# Altium PCB VoxPopuli.PcbDoc
Units mm, origin at the board's own origin, x right, y up, seen from the top; angles counter-clockwise.
Board outline 152.4 x 101.6 mm, 2 copper layers (Top Layer, Bottom Layer); 16 components, 29 nets, 96 pads, 0 vias.
Unrouted connection lines stored in the file: 51.
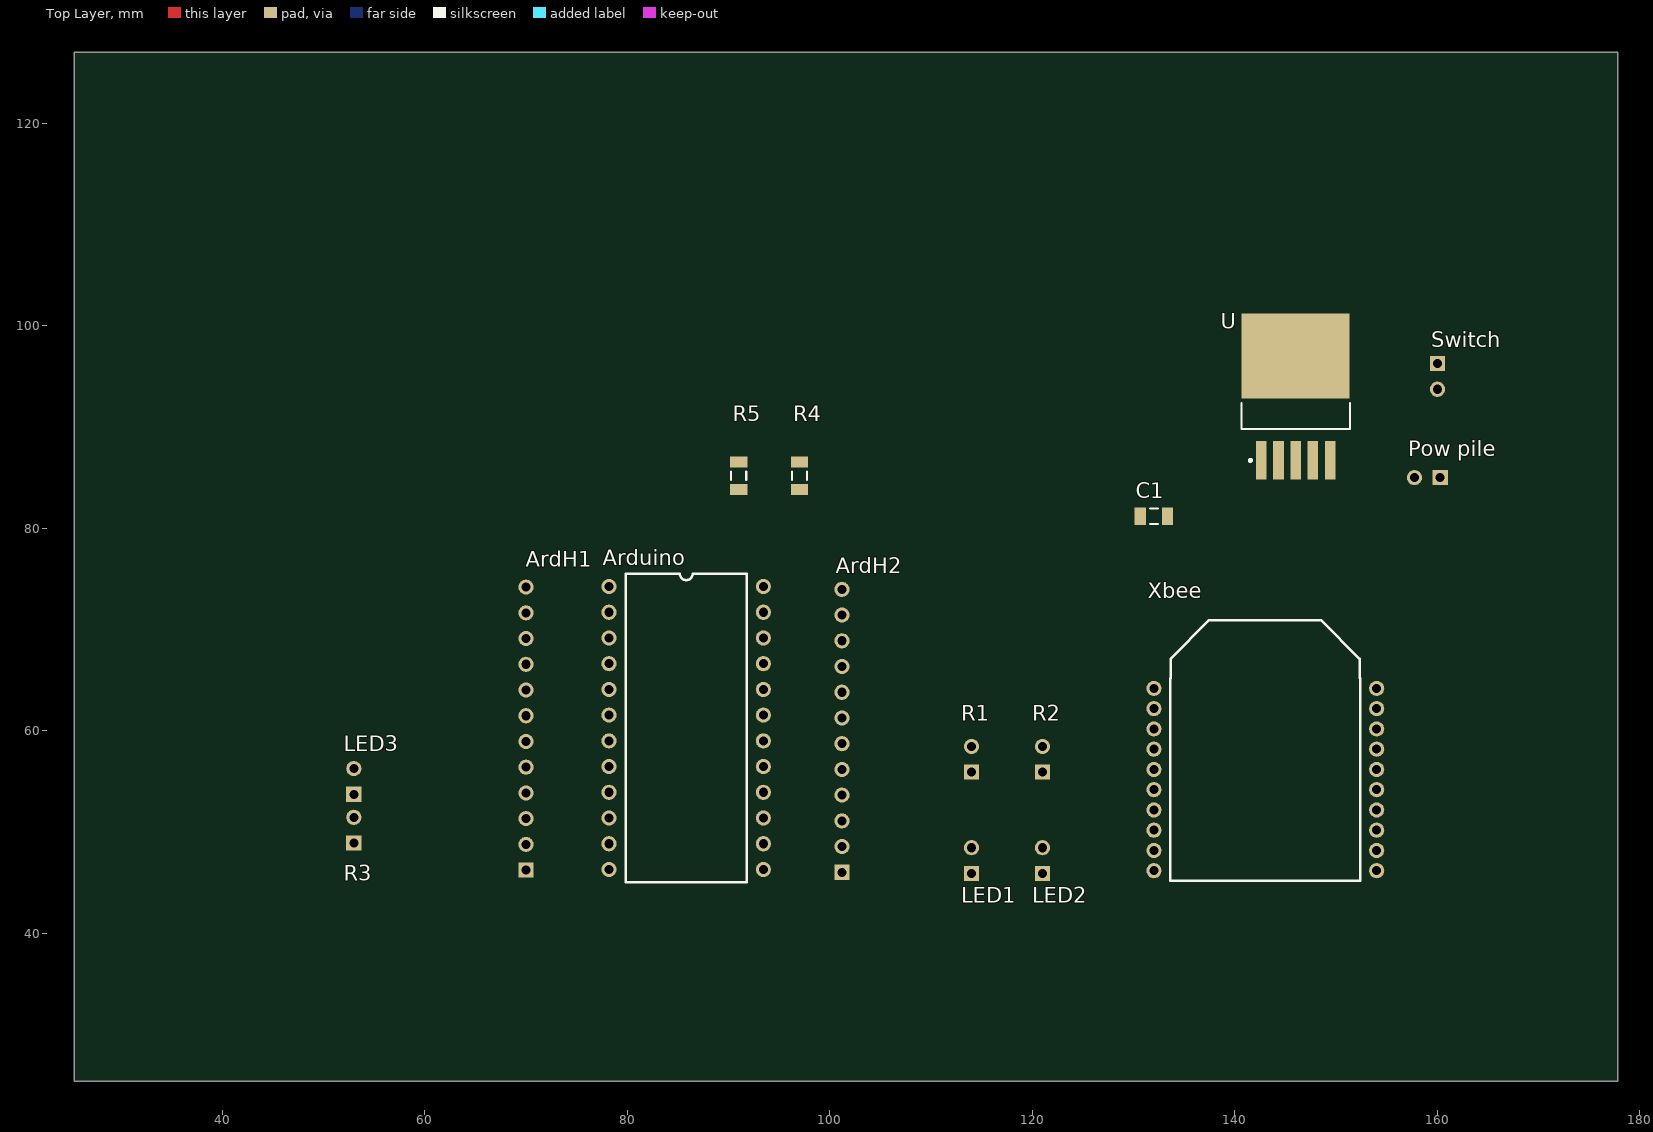
[diagram p0: Top Layer view]
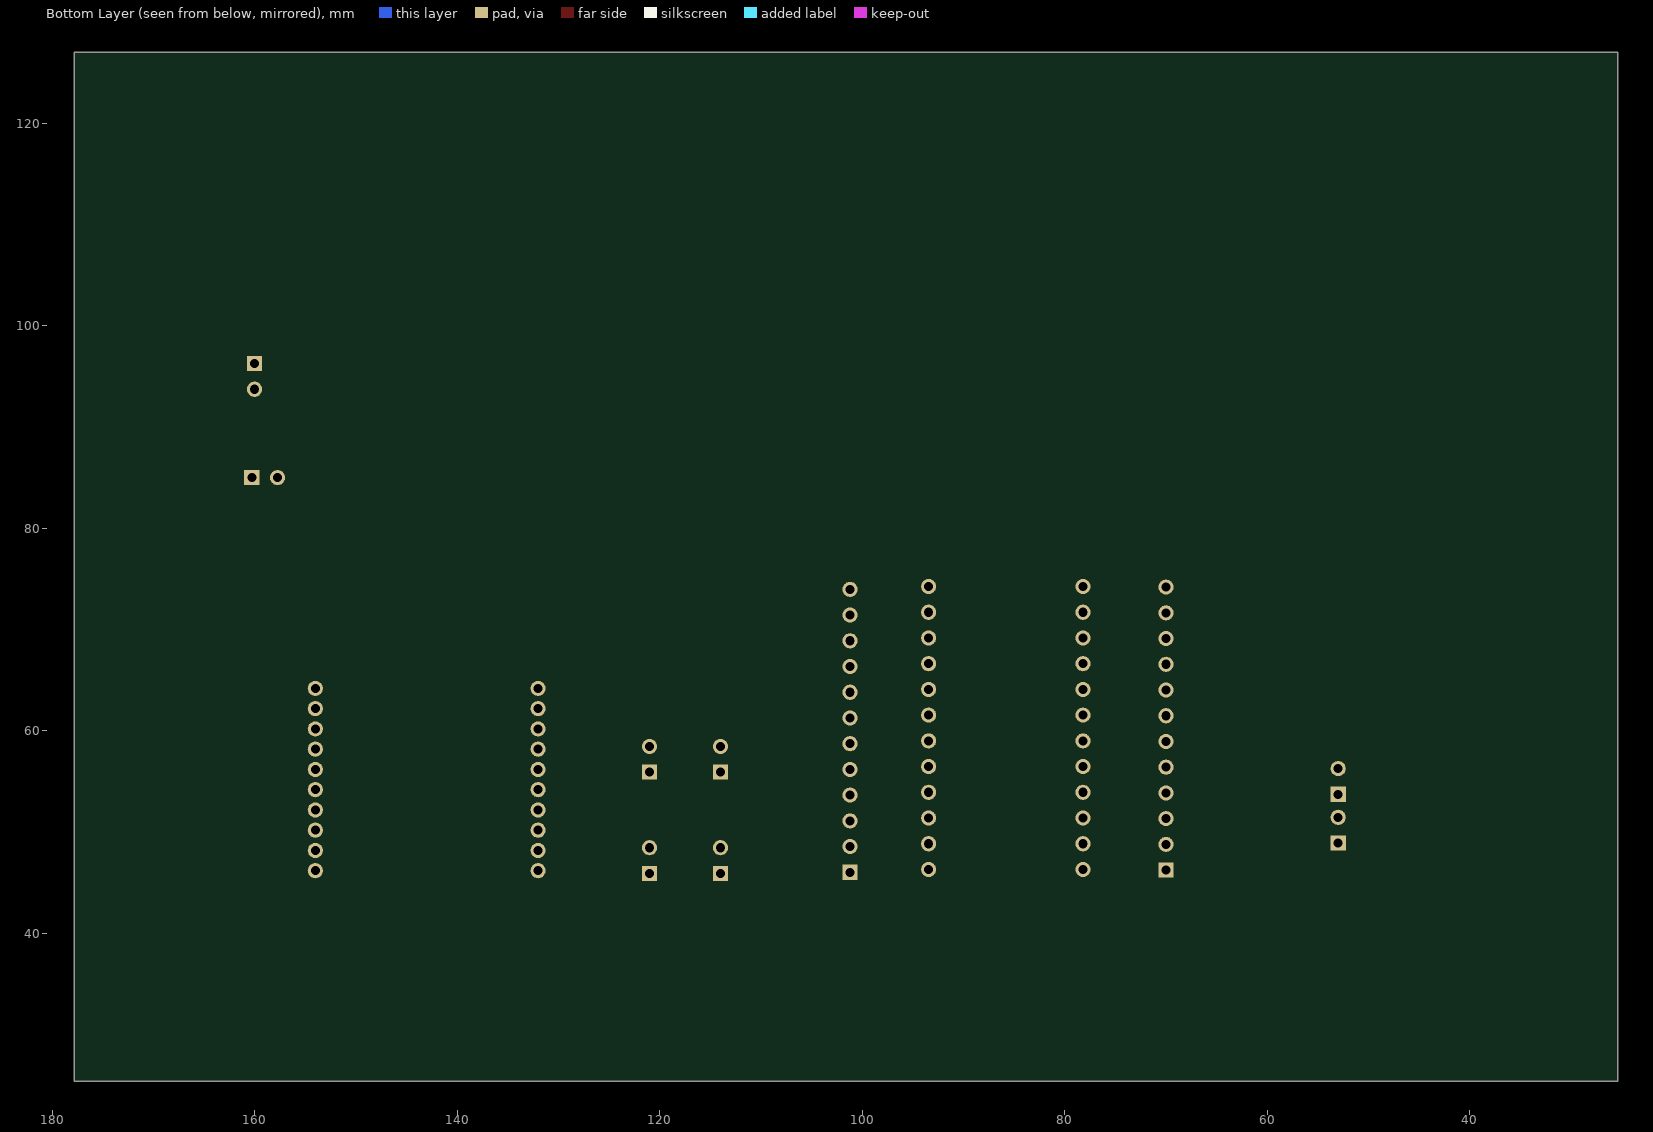
[diagram p1: Bottom Layer view, seen from below]

## Layer stack, top to bottom
Top Solder: solder mask 0.0102, Solder Resist, Dk 3.5
Top Layer: signal copper 0.0356
Dielectric 1: dielectric 0.32, FR-4, Dk 4.8
Bottom Layer: signal copper 0.0356
Bottom Solder: solder mask 0.0102, Solder Resist, Dk 3.5

## Board outline
25.4,25.4 177.8,25.4 177.8,127 25.4,127

## Design rules (kind name [scope] priority, off if disabled: settings)
Clearance [All] p1: gap=0.254
PolygonConnect [All] p1: connectstyle=Relief reliefconductorwidth=0.254 reliefentries=4 polygonreliefangle="90 Angle" airgapwidth=0.254
RoomDefinition VoxPopuli [InComponentClass('VoxPopuli')] p1: confinementstyle=ConfineIn formatcopy=TRUE lockcomponents=FALSE outline 27.2,38.25 177.2,38.25 177.2,111.25 27.2,111.25
RoutingVias [All] p1: holewidth=0.711 width=1.27 viastyle="Through Hole" minholewidth=0.711 minwidth=1.27 maxholewidth=0.711 maxwidth=1.27
SolderMaskExpansion [All] p1: expansion=0.102
Width [All] p1: maxlimit=0.254 minlimit=0.254 preferedwidth=0.254
30 further rules are at their usual default settings.

## Components (designator, comment, footprint, x,y, rotation, side; value= is the part's Value field where it differs from the comment)
ArdH1 "Header 12" "HEADER 12" 70,60.22 r90 top
ArdH2 "Header 12" "HEADER 12" 101.2,60 r90 top
Arduino "Arduino Mini Pro" "ARDUINO DIP 2" 78.2,74.25 r0 top
C1 "Cap Semi" C1206 132,81.19 r180 top
LED1 "Header 2" "HEADER 2" 114,47.19 r90 top
LED2 "Header 2" "HEADER 2" 121,47.19 r90 top
LED3 "Header 2" "HEADER 2" 53,55 r90 top
"Pow pile" "Header 2" "HEADER 2" 159,85 r180 top
R1 "Header 2" "HEADER 2" 114,57.19 r90 top
R2 "Header 2" "HEADER 2" 121,57.19 r90 top
R3 "Header 2" "HEADER 2" 53,50.19 r90 top
R4 "Res1" C1206 97,85.19 r90 top
R5 "Res1" C1206 91,85.19 r90 top
Switch "Header 2" "HEADER 2" 160,95 r270 top
U "TL2575-33IKTTR" KTT5_N 146,93 r90 top
Xbee "Xbee" "XBEE DIP 2" 132,64.19 r0 top

## Footprints (in the part's own frame and the unit in brackets; to place one, negate y for a bottom-side part, rotate by r counter-clockwise, add the part's x,y. Pads: shape width x height; smd on the part's side, far side on the other; paste and mask are expansions set on the pad)
"ARDUINO DIP 2" [mm]
  round 1.5 hole 0.9: 21(0,0) 22(0,-2.54) 23(0,-5.08) 24(0,-7.62) 25(0,-10.16) 26(0,-12.7) 27(0,-15.24) 28(0,-17.78) 29(0,-20.32) 30(0,-22.86) 31(0,-25.4) 32(0,-27.94) 33(15.24,0) 34(15.24,-2.54) 35(15.24,-5.08) 36(15.24,-7.62) 37(15.24,-10.16) 38(15.24,-12.7) 39(15.24,-15.24) 40(15.24,-17.78) 41(15.24,-20.32) 42(15.24,-22.86) 43(15.24,-25.4) 44(15.24,-27.94)
  silkscreen extent 1.63,-29.21 13.61,1.27
C1206 [mm] "Chip Capacitor, Body 3.2x1.6mm, IPC High Density"
  rect 1.1x1.7 smd: 1(-1.35,0) 2(1.35,0)
  silkscreen extent -0.4,-0.75 0.4,0.75, body extent -1.7,-0.9 1.7,0.9, height 1.3
"HEADER 2" [mm]
  rect 1.5x1.5 hole 0.9: 1(-1.27,0)
  round 1.5 hole 0.9: 2(1.27,0)
"HEADER 12" [mm]
  rect 1.5x1.5 hole 0.9: 1(-13.97,0)
  round 1.5 hole 0.9: 2(-11.43,0) 3(-8.89,0) 4(-6.35,0) 5(-3.81,0) 6(-1.27,0) 7(1.27,0) 8(3.81,0) 9(6.35,0) 10(8.89,0) 11(11.43,0) 12(13.97,0)
KTT5_N [mm] "D2-PAK, 6-Leads, Body 8.9x10.2mm, Pitch 1.7mm, Lead Span 15.2mm, IPC Medium Density"
  rect 3.8x1.05 smd: 1(-6.3,3.4) 2(-6.3,1.7) 3(-6.3,0) 4(-6.3,-1.7) 5(-6.3,-3.4)
  rect 8.4x10.65 smd: 6(4,0)
  silkscreen extent -6.42,-5.35 -0.65,5.35, body extent -3.2,-5.32 6.45,5.33, height 4.83
"XBEE DIP 2" [mm]
  round 1.5 hole 0.9: 1(0,0) 2(0,-2) 3(0,-4) 4(0,-6) 5(0,-8) 6(0,-10) 7(0,-12) 8(0,-14) 9(0,-16) 10(0,-18) 11(22,-18) 12(22,-16) 13(22,-14) 14(22,-12) 15(22,-10) 16(22,-8) 17(22,-6) 18(22,-4) 19(22,-2) 20(22,0)
  silkscreen extent 1.63,-19 20.37,6.73

## Part data
ArdH1 ArdH2: "Header, 12-Pin"
Arduino: "Arduino Board"
C1: "Capacitor (Semiconductor SIM Model)"
LED1 LED2 LED3 "Pow pile" R1 R2 R3 Switch: "Header, 2-Pin"
R4 R5: "Resistor"
U: "Buck Step Down Regulator with 4.75 to 40 V Input and 3.3 V Output, -40 to 125 degC, 5-Pin DDPAK/TO-263 (KTT), Green (RoHS & no Sb/Br)"
Xbee: "Xbee Card"

## Nets (pads, with @x,y where several pads share a name; then routed paths per layer and width w, separated by ;. In a path a pad name is that pad's centre, name@x,y a point inside that pad or via, vN(x,y) a via of type N, cw(c..) or ccw(c..) an arc to the next point about the centre after c; other vN are vias at no path point)
A1: ArdH2.6 Arduino.39
A2: ArdH2.7 Arduino.38
A3: ArdH2.8 Arduino.37
ADC: ArdH2.5 Arduino.40 R4.2 R5.1
"BOUT. ACTION": ArdH1.6 Arduino.27
"BOUT. DOWN": ArdH1.5 Arduino.28
"BOUT. LEFT": ArdH1.2 Arduino.31
"BOUT. RIGHT": ArdH1.4 Arduino.29
"BOUT. UP": ArdH1.3 Arduino.30
GND: "Pow pile.2" ArdH2.11 Arduino.34 LED1.2 LED2.2 LED3.2 R5.2 U.3 U.5 Xbee.10
LED1: LED1.1 R1.2
LED2: LED2.1 R2.2
LED3: LED3.1 R3.2
MISO: ArdH2.3 Arduino.42
ON/SLEEP: ArdH1.1 Arduino.32 Xbee.13
PIN24: ArdH1.9 Arduino.24
PIN25: ArdH1.8 Arduino.25
R1: ArdH2.1 Arduino.44 R1.1
R2: ArdH2.2 Arduino.43 R2.1
R3: ArdH1.7 Arduino.26 R3.1
RAW: ArdH2.12 Arduino.33
RESET: ArdH1.10 ArdH2.10 Arduino.23 Arduino.35
RX: ArdH1.11 Arduino.22 Xbee.2
SCK: ArdH2.4 Arduino.41
TX: ArdH1.12 Arduino.21 Xbee.3
UIN: Switch.1 U.1
UOUT: C1.1 U.2 U.4
VCC: "Pow pile.1" Switch.2
VIN: ArdH2.9 Arduino.36 C1.2 R4.1 Xbee.1
pads on no net: U.6 Xbee.4 Xbee.5 Xbee.6 Xbee.7 Xbee.8 Xbee.9 Xbee.11 Xbee.12 Xbee.14 Xbee.15 Xbee.16 Xbee.17 Xbee.18 Xbee.19 Xbee.20